# Altium PCB 3_Interface_Charge_RBF.PcbDoc
Units mm, origin at the board's own origin, x right, y up, seen from the top; angles counter-clockwise.
Board outline 82.5 x 29 mm, 2 copper layers (Top Layer, Bottom Layer); 8 components, 4 nets, 22 pads, 0 vias.
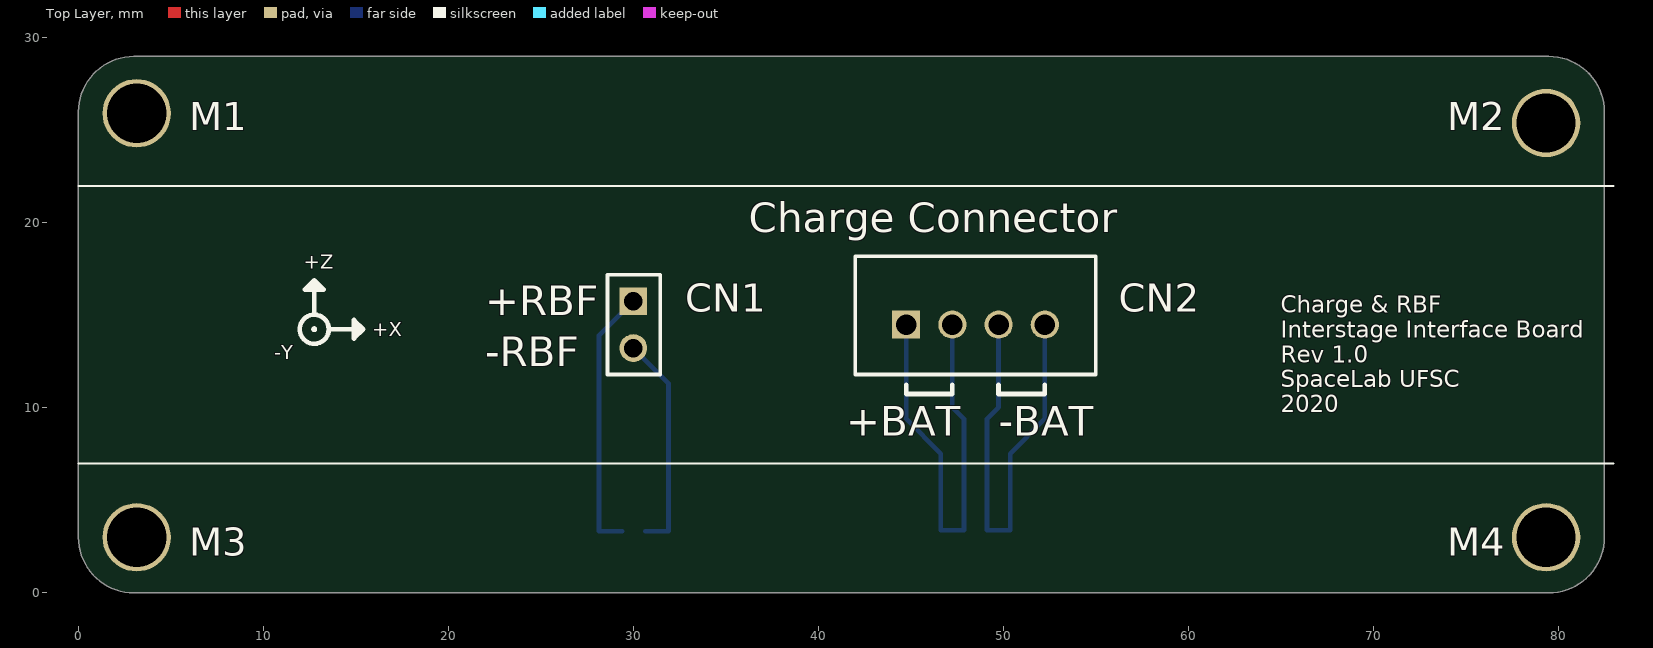
[diagram p0: Top Layer view]
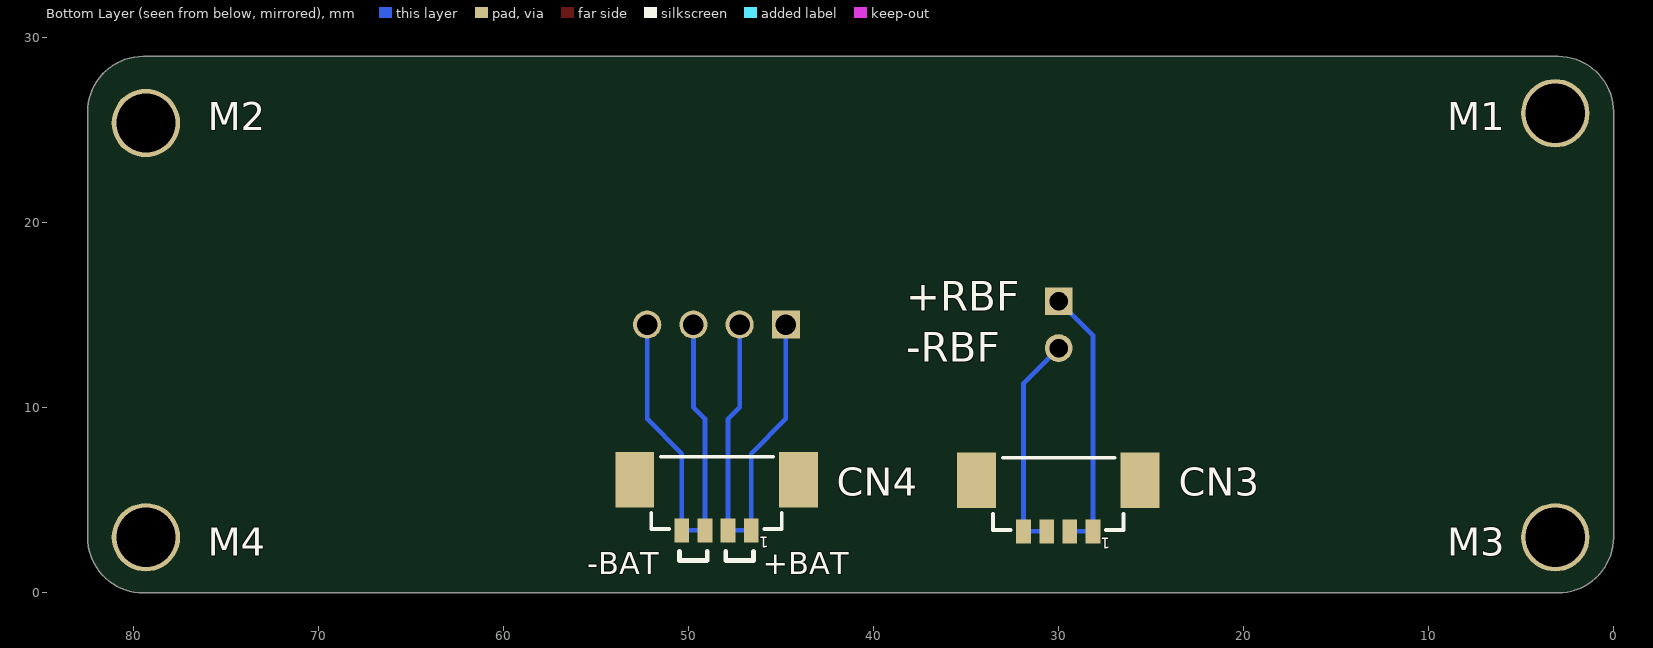
[diagram p1: Bottom Layer view, seen from below]

## Layer stack, top to bottom
Top Solder: solder mask 0.0102, Solder Resist, Dk 3.5
Top Layer: signal copper 0.0356
Dielectric 1: dielectric 0.32, FR-4, Dk 4.8
Bottom Layer: signal copper 0.0356
Bottom Solder: solder mask 0.0102, Solder Resist, Dk 3.5

## Board outline
79.5,0 ccw(c79.5,3) 82.5,3 82.5,26 ccw(c79.5,26) 79.5,29 3,29 ccw(c3,26) 0,26 0,3 ccw(c3,3) 3,0

## Design rules (kind name [scope] priority, off if disabled: settings)
Clearance [All] p1: gap=0.254 ignorepadtopadclearanceinfootprint=FALSE except(0: Arc-Hole Track-Hole SMDPad-Hole THPad-Hole Via-Hole Fill-Hole Poly-Hole Region-Hole Text-Hole)
PolygonConnect [All] p1: connectstyle=Relief reliefconductorwidth=0.254 reliefentries=4 polygonreliefangle="90 Angle" airgapwidth=0.254
RoutingVias [All] p1: holewidth=0.711 width=1.27 viastyle="Through Hole" minholewidth=0.711 minwidth=1.27 maxholewidth=0.711 maxwidth=1.27
SolderMaskExpansion [All] p1: expansion=0.102
Width [All] p1: maxlimit=0.254 minlimit=0.254 preferedwidth=0.254
30 further rules are at their usual default settings.

## Classes and differential pairs
component class 3_Interface_Charge_RBF: CN1 CN2 CN3 CN4
component class 0_Architecture: M1 M2 M3 M4

## Components (designator, comment, footprint, x,y, rotation, side; value= is the part's Value field where it differs from the comment)
CN1 "M20-9990245" "CONN HEADER VERT 2POS 2.54mm" 30,14.5 r270 top
CN2 "B4B-XH-A(LF)(SN)" B4B-XH-A(LF)(SN) 48.5,14.5 r0 top
CN3 "0533980471" "PICO BLADE 0533980471" 30.025,4.7 r0 bottom
CN4 "0533980471" "PICO BLADE 0533980471" 48.5,4.75 r0 bottom
M1 "IB Mechanical Hole" "IB Mechanical Hole" 3.15,25.925 r0 top
M2 "IB Mechanical Hole" "IB Mechanical Hole" 79.35,25.4 r0 top
M3 "IB Mechanical Hole" "IB Mechanical Hole" 3.15,3 r0 top
M4 "IB Mechanical Hole" "IB Mechanical Hole" 79.35,3 r0 top

## Footprints (in the part's own frame and the unit in brackets; to place one, negate y for a bottom-side part, rotate by r counter-clockwise, add the part's x,y. Pads: shape width x height; smd on the part's side, far side on the other; paste and mask are expansions set on the pad)
B4B-XH-A(LF)(SN) [mm]
  rect 1.524x1.524 hole 1.1: 1(-3.75,0)
  round 1.524 hole 1.1: 2(-1.25,0) 3(1.25,0) 4(3.75,0)
  silkscreen extent -6.5,-2.7 6.5,3.7, body extent -6.2,-2.38 6.2,3.38, height 7.01
"CONN HEADER VERT 2POS 2.54mm" [mm]
  rect 1.5x1.5 hole 1: 1(-1.27,0)
  round 1.5 hole 1: 2(1.27,0)
  silkscreen extent -2.7,-1.4 2.7,1.45, body extent -2.54,-1.25 2.54,1.29, height 8.65
"IB Mechanical Hole" [mm]
  round 3.7 hole 3.2: 0(0,0)
"PICO BLADE 0533980471" [mm]
  rect 2.1x3 smd: 0(-4.425,-1.375) 0(4.425,-1.375)
  rect 0.8x1.3 smd: 1(-1.875,1.375) 2(-0.625,1.375) 3(0.625,1.375) 4(1.875,1.375)
  silkscreen extent -3.52,-2.6 3.52,1.3, body extent -5.08,-2.5 5.07,1.7, height 4.7

## Part data
CN1: "M20 HDR, PIN, SIL, VERT, 2W", Case/Package=SIL, Color=Black, Contact Resistance=25mR, Current=3A, Insulation Resistance=10GR, Manufacturer=Harwin, Max Operating Temperature=105°C, Min Operating Temperature=-40°C, Package Quantity=1000, Supplier Part Number 1=952-2261-ND, Voltage=50V, Voltage Rating (AC)=750V, ComponentLink1Description=http://www.farnell.com/datasheets/2368211.pdf?src-supplier=Element14, ComponentLink1URL=http://www.farnell.com/datasheets/2368211.pdf?src-supplier=Element14, ComponentLink2Description=http://uk.rs-online.com/webdocs/1388/0900766b81388728.pdf?src-supplier=RSComponents, ComponentLink2URL=http://uk.rs-online.com/webdocs/1388/0900766b81388728.pdf?src-supplier=RSComponents, ComponentLink3Description=https://cdn.harwin.com/pdfs/Harwin_PC_Connectors_M20.pdf?src-supplier=Digi-Key, ComponentLink3URL=https://cdn.harwin.com/pdfs/Harwin_PC_Connectors_M20.pdf?src-supplier=Digi-Key, ComponentLink4Description=http://www.mouser.com/ds/2/181/Harwin_Product_Catalog_page_206-1134556.pdf?src-supplier=Mouser, ComponentLink4URL=http://www.mouser.com/ds/2/181/Harwin_Product_Catalog_page_206-1134556.pdf?src-supplier=Mouser, Connector Type="Male Pin", Contact Material=Brass,Bronze, Contact Mating Length=0.24inch, Contact Plating=Gold, Current Rating=3A, Depth=2.54mm, Gender=Male, Height=0.12inch, Housing Color=Black, Housing Material=Nylon, Lead Pitch=2.54mm, Length=5.08mm, Manufacturer Part Number=M20-9990245, Mating Cycles=300, Max Current Rating=3A, Mount="Through Hole", Number of Contacts=2, Number of Poles=2, Number of Positions=2, Number of Rows=1, Orientation=Straight, Packaging=Bag, Pitch=2.54mm, Pricing 1="1=0.15, 10=0.136, 100=0.0841, 500=0.0696, 1000=0.0609, 5000=0.0522, 10000=0.05075 (USD)", Pricing 2="1=0.14, 10=0.083, 100=0.069, 1000=0.06, 2000=0.052, 10000=0.05 (USD)", Radiation Hardening=No, REACH SVHC="No SVHC", Stock 1=27298, Stock 2=26881, Supplier 1=Digi-Key, Supplier 2=Mouser, Supplier Part Number 2=855-M20-9990245, Termination=Solder, Weight=0.25lb, Width=0.25inch, Working Voltage=750V
CN2: "JST (JAPAN SOLDERLESS TERMINALS) - B4B-XH-A (LF)(SN) - Wire-To-Board-Steckverbinder, vertikal, 2.5 mm, 4 Kontakt(e), Stiftleiste, Baureihe XH", Color=Natural, Contact Resistance=20mR, Current Rating=3A, Housing Color=White, Insulation Resistance=1GR, Manufacturer=JST, Max Operating Temperature=85°C, Max Voltage Rating (AC)=250V, Min Operating Temperature=-25°C, Package Quantity=500, Supplier Part Number 1=455-2249-ND, ComponentLink1Description=https://www.verical.com/server-webapp/html/getDatasheet?partID=455616&src-supplier=Verical, ComponentLink1URL=https://www.verical.com/server-webapp/html/getDatasheet?partID=455616&src-supplier=Verical, ComponentLink2Description=https://www.verical.com/server-webapp/html/getDatasheet?partID=640571&src-supplier=Verical, ComponentLink2URL=https://www.verical.com/server-webapp/html/getDatasheet?partID=640571&src-supplier=Verical, ComponentLink3Description=http://www.jst-mfg.com/product/pdf/eng/eXH.pdf?src-supplier=Digi-Key, ComponentLink3URL=http://www.jst-mfg.com/product/pdf/eng/eXH.pdf?src-supplier=Digi-Key, ComponentLink4Description=http://www.jst-mfg.com/product/pdf/eng/eXH.pdf?src-supplier=Future+Electronics, ComponentLink4URL=http://www.jst-mfg.com/product/pdf/eng/eXH.pdf?src-supplier=Future+Electronics, Connector Type="Male Pin", Contact Material=Brass, Contact Plating=Tin,Copper,Lead, Depth=5.75mm, Gender=Male, Housing Material=Polyamide, Lead Free="Lead Free", Lead Pitch=2.5mm, Length=12.4mm, Manufacturer Part Number=B4B-XH-A(LF)(SN), Material=Polyamide, Max Current Rating=3A, Max Voltage Rating (DC)=250V, Mount="Through Hole", Number of Contacts=4, Number of Positions=4, Number of Rows=1, Orientation=Straight, Packaging=Bulk, Pitch=2.5mm, Pricing 1="1=0.21, 10=0.194, 100=0.1348, 500=0.11406, 1000=0.09333, 5000=0.08296, 10000=0.07518 (USD)", REACH SVHC="No SVHC", Stock 1=12513, Supplier 1=Digi-Key, Termination=Press-Fit, Voltage Rating=250V, Voltage Rating (AC)=250V, Wire/Cable Gauge=22AWG
CN3 CN4: "CONN HEADER SMD 4POS 1.25MM", Manufacturer=Molex, Mount Type=SMD, N of Positions=4, Pitch=1.25mm
M1 M2 M3 M4: "Mechanical Hole for FloripaSat-2 interface boards"

## Nets (pads, with @x,y where several pads share a name; then routed paths per layer and width w, separated by ;. In a path a pad name is that pad's centre, name@x,y a point inside that pad or via, vN(x,y) a via of type N, cw(c..) or ccw(c..) an arc to the next point about the centre after c; other vN are vias at no path point)
"BAT +": CN2.1 CN2.2 CN4.1 CN4.2 | length 24.5
  Bottom Layer w0.254: CN2.1 44.75,9.4 46.625,7.525 CN4.1 CN4.2 47.875,9.4 47.25,10.025 CN2.2
"BAT -": CN2.3 CN2.4 CN4.3 CN4.4 | length 24.5
  Bottom Layer w0.254: CN2.3 49.75,10.025 49.125,9.4 CN4.3 CN4.4 50.375,7.525 52.25,9.4 CN2.4
RBF+: CN1.1 CN3.1 CN3.2 | length 14.5
  Bottom Layer w0.254: CN3.2 CN3.1 28.15,13.92 CN1.1
RBF-: CN1.2 CN3.3 CN3.4 | length 11.9
  Bottom Layer w0.254: CN1.2 31.9,11.33 CN3.4 CN3.3
pads on no net: CN3.0 CN4.0 M1.0 M2.0 M3.0 M4.0

## Silkscreen, mask and mechanical layers (free items; w line width, h text height)
Top Overlay:
  circle w0.254: c12.75,14.25 r0.035
  circle w0.254: c12.75,14.25 r0.785
  region: 14.775,14.75 15.275,14.25 14.775,13.75
  region: 12.25,16.275 12.75,16.775 13.25,16.275
  lines w0.1: 0,7 83,7 ; 0,22 83,22
  lines w0.254: 12.25,16.4 12.75,16.9 ; 12.75,15.035 12.75,16.9 ; 13.25,16.4 12.75,16.9 ; 13.535,14.25 15.4,14.25 ; 14.9,13.75 15.4,14.25 ; 14.9,14.75 15.4,14.25 ; 44.75,11.25 44.75,10.75 ; 47.25,11.25 47.25,10.75 ; 49.75,11.25 49.75,10.75 ; 52.25,11.25 52.25,10.75 ; 44.75,10.75 47.25,10.75 ; 44.75,10.75 47.25,10.75 ; 49.75,10.75 52.25,10.75 ; 49.75,10.75 52.25,10.75
  text "Charge Connector" at 36.237,19.5 h1.6
  text "+Z" at 12.175,17.525 h0.76
  text "+RBF" at 22,15 h1.6
  text "+X" at 15.875,13.875 h0.76
  text "-Y" at 10.6,12.625 h0.76
  text "-RBF" at 22,12.25 h1.6
  text "Charge & RBF / Interstage Interface Board / Rev 1.0 / SpaceLab UFSC / 2020" at 65,9.75 h0.9
  text "+BAT" at 41.5,8.5 h1.6
  text "-BAT" at 49.75,8.5 h1.6
Bottom Overlay:
  lines w0.254: 46.5,2.25 46.5,1.75 ; 48,2.25 48,1.75 ; 49,2.25 49,1.75 ; 50.5,2.25 50.5,1.75 ; 46.5,1.75 48,1.75 ; 46.5,1.75 48,1.75 ; 49,1.75 50.5,1.75 ; 49,1.75 50.5,1.75
  text "M1" at 9,25 h1.52
  text "M2" at 76,25 h1.52
  text "+RBF" at 38.25,15.25 h1.6
  text "-RBF" at 38.25,12.5 h1.6
  text "M3" at 9,2 h1.52
  text "M4" at 76,2 h1.52
  text "+BAT" at 46,1 h1.2
  text "-BAT" at 55.5,1 h1.2

## Text inside footprints (layer, text, board x,y; h text height)
CN3: Bottom Overlay "1" at 27.2,3.2 h1 r180
CN4: Bottom Overlay "1" at 45.675,3.25 h1 r180